# Altium PCB PCB_AEM_REV_2_5_2023-04-29.pcbdoc
Units mil, origin at the board's own origin, x right, y up, seen from the top; angles counter-clockwise.
Board outline 1740 x 2151.59 mil, 2 copper layers (Top Layer, Bottom Layer); 19 components, 24 nets, 80 pads, 33 vias.
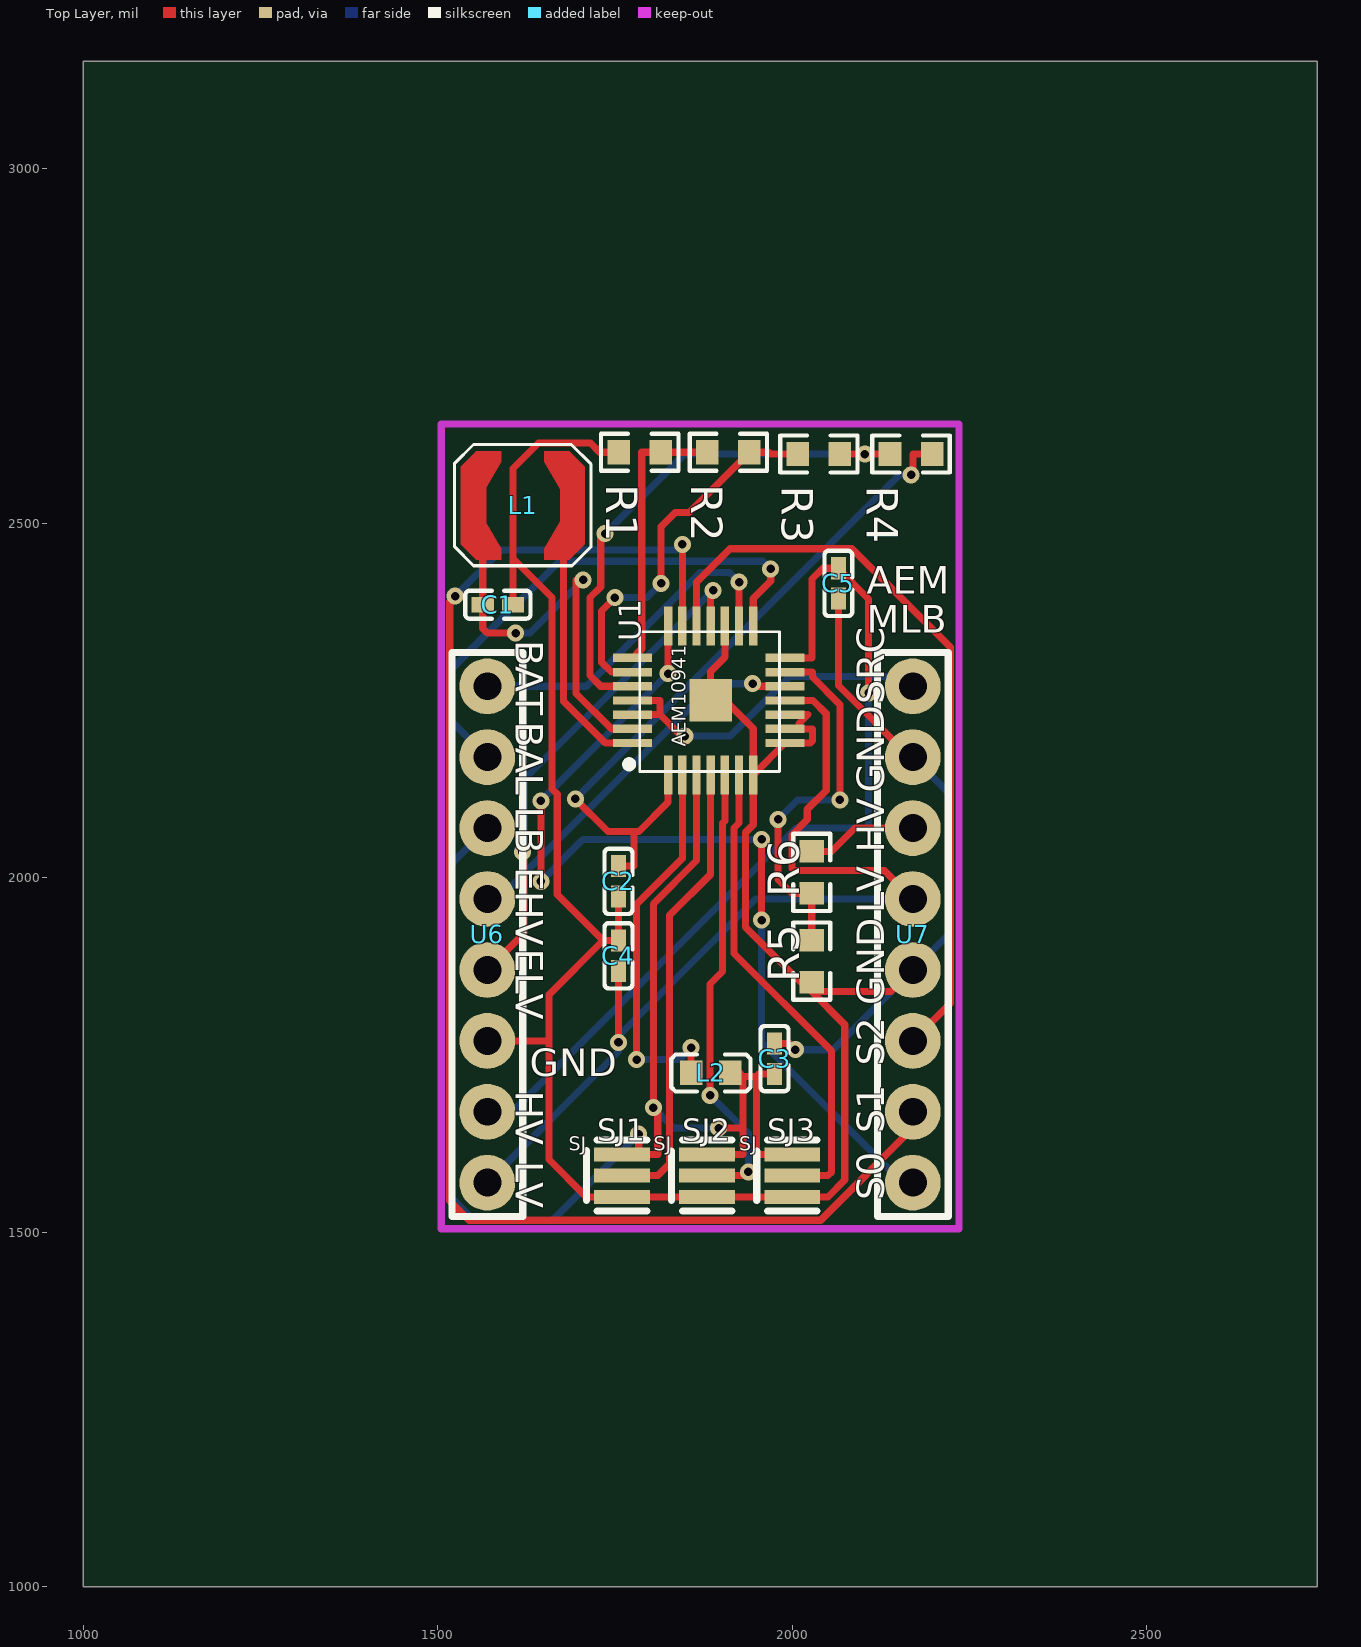
[diagram p0: Top Layer view]
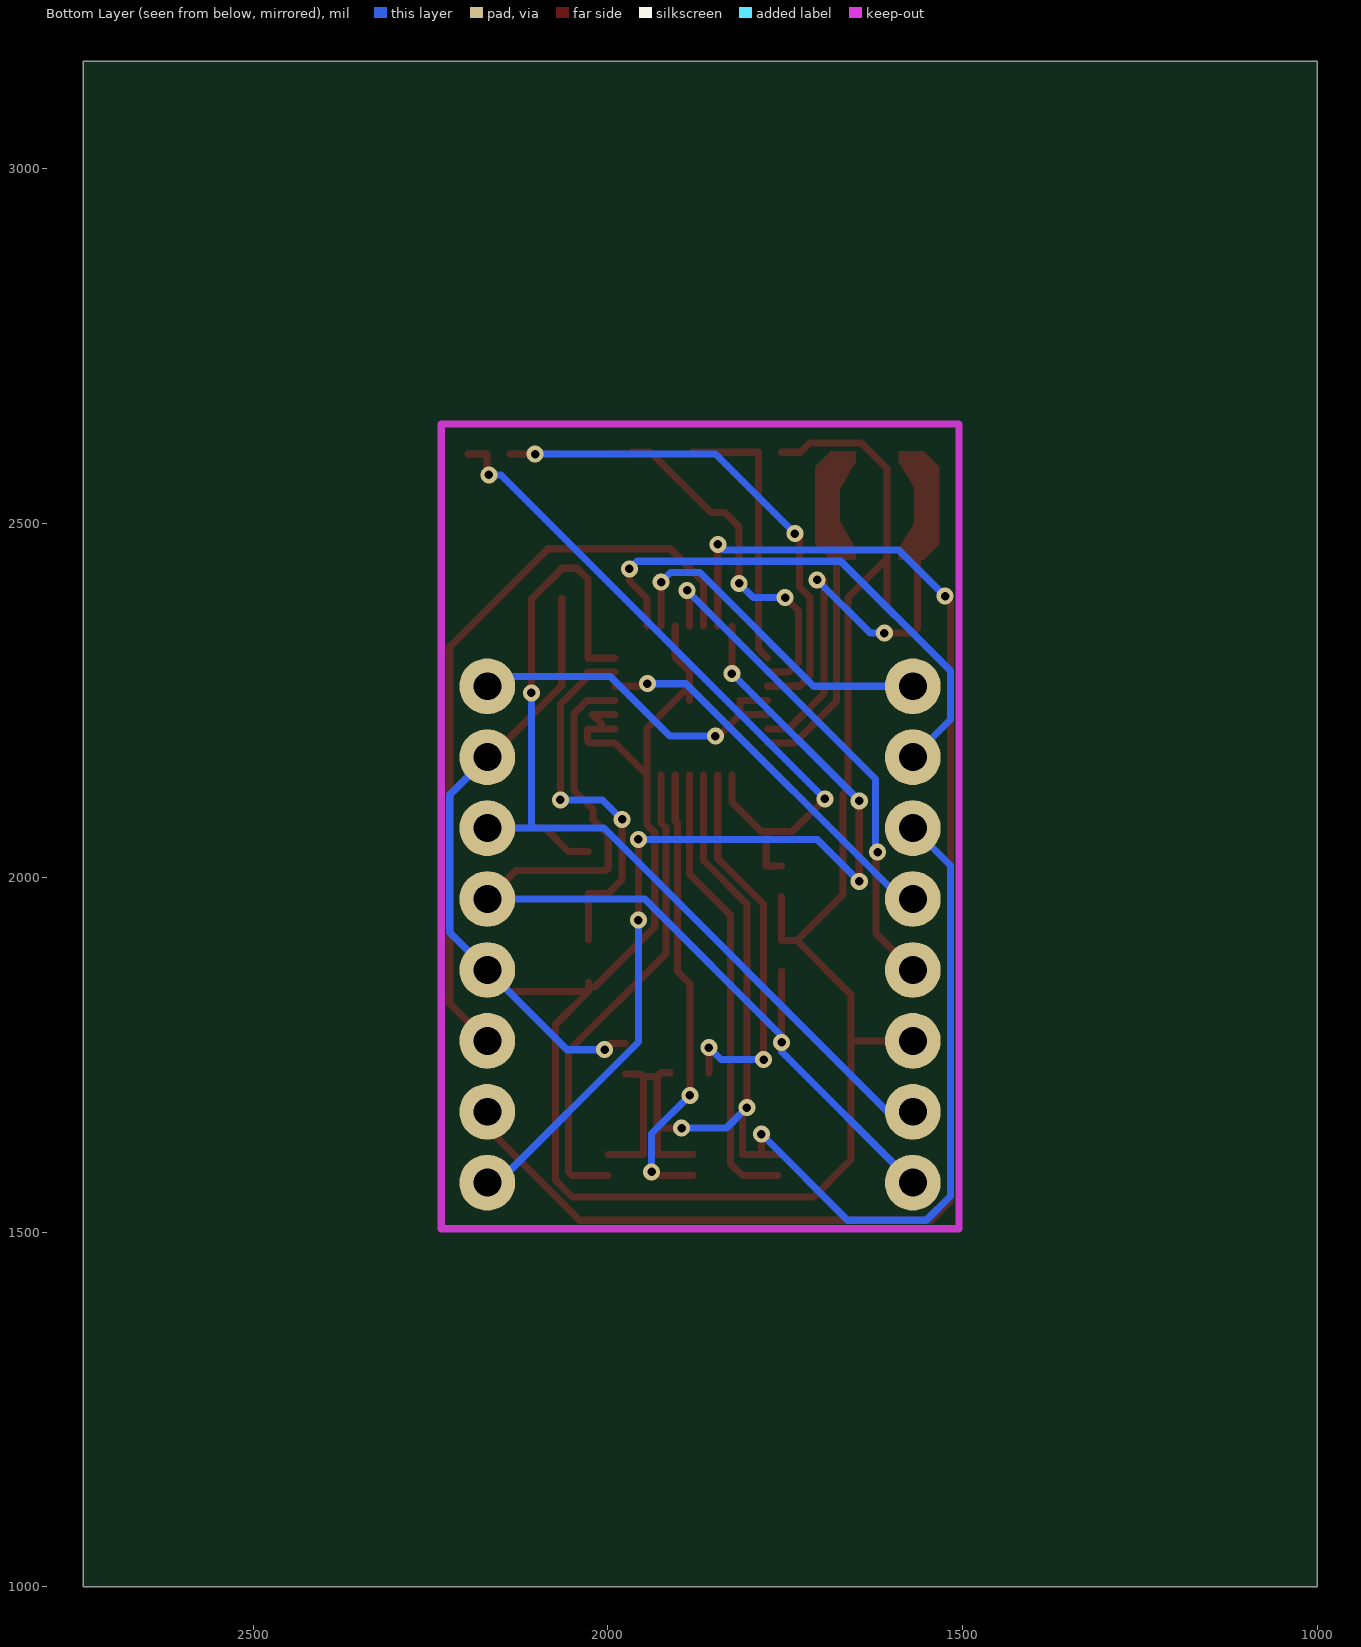
[diagram p1: Bottom Layer view, seen from below]

## Layer stack, top to bottom
Top Layer: signal copper (thickness not stored)
Dielectric: dielectric 12.6, FR-4, Dk 4.8
Bottom Layer: signal copper (thickness not stored)

## Board outline
2740,1000 1000,1000 1000,3151.59 2740,3151.59

## Components (designator, comment, footprint, x,y, rotation, side; value= is the part's Value field where it differs from the comment)
C1 "10uF" C0402 1585,2384.99 r180 top
C2 "22uF" C0402 1755,1994.99 r90 top
C3 "10uF" C0402 1975,1744.99 r270 top
C4 "10uF" C0402 1755,1889.99 r270 top
C5 "10uF" C0402 2065,2414.99 r90 top
L1 "LPS4012" "LPS4012 COILCRAFT" 1620,2524.99 r0 top
L2 "10uH" L0603 1885,1724.99 r180 top
R1 "11 Mohm" R0603 1785,2599.99 r0 top
R2 "0.249 Mohm" R0603 1910,2599.99 r0 top
R3 "8.66 Mohm" R0603 2037.5,2597.49 r0 top
R4 "30 Mohm" R0603 2167.5,2597.49 r0 top
R5 "4.53 Mohm" R0603 2027.5,1882.49 r90 top
R6 "5.49 Mohm" R0603 2027.5,2007.49 r90 top
SJ1 "Solder_Jumper" SOLDER_JUMPER 1760,1579.99 r0 top
SJ2 "Solder_Jumper" SOLDER_JUMPER 1880,1579.98 r0 top
SJ3 "Solder_Jumper" SOLDER_JUMPER 2000,1579.98 r0 top
U1 "AEM10941_QFN28" AEM_QFN28 1785,2149.99 r90 top
U6 "8_pin_2.54_header" 8_PIN_HEADER 1570,1570 r0 top
U7 "8_pin_2.54_header" 8_PIN_HEADER 2170,1570 r0 top

## Footprints (in the part's own frame and the unit in brackets; to place one, negate y for a bottom-side part, rotate by r counter-clockwise, add the part's x,y. Pads: shape width x height; smd on the part's side, far side on the other; paste and mask are expansions set on the pad)
8_PIN_HEADER [mm]
  round 2 hole 1: 1(0,0) 2(0,2.54) 3(0,5.08) 4(0,7.62) 5(0,10.16) 6(0,12.7) 7(0,15.24) 8(0,17.78)
  silkscreen extent -1.27,-1.21 1.27,18.99
AEM_QFN28 [mm]
  rect 1.4x0.3 smd: 1(-0.127,-1.016) 2(-0.127,-1.524) 3(-0.127,-2.032) 4(-0.127,-2.54) 5(-0.127,-3.048) 6(-0.127,-3.556) 7(-0.127,-4.064) 15(5.207,-4.064) 16(5.207,-3.556) 17(5.207,-3.048) 18(5.207,-2.54) 19(5.207,-2.032) 20(5.207,-1.524) 21(5.207,-1.016)
  rect 0.3x1.4 smd: 8(1.016,-5.207) 9(1.524,-5.207) 10(2.032,-5.207) 11(2.54,-5.207) 12(3.048,-5.207) 13(3.556,-5.207) 14(4.064,-5.207) 22(4.064,0.254) 23(3.556,0.254) 24(3.048,0.254) 25(2.54,0.254) 26(2.032,0.254) 27(1.524,0.254) 28(1.016,0.254)
  rect 1.524x1.524 smd: 29(2.54,-2.54)
  silkscreen extent 0,-5 5,0.51
C0402 [mm]
  rect 0.79x0.54 smd: 1(-0.545,0) 2(0.545,0)
  silkscreen extent -1.17,-0.5 1.17,0.5
L0603 [mm]
  rect 0.8x0.864 smd: 1(-0.7,0) 2(0.7,0)
  silkscreen extent -1.42,-0.65 1.41,0.67
"LPS4012 COILCRAFT" [mil]
  round 0 smd: 1(-57.5,50) 2(57.5,-50)
  Top Layer region: -87.5,54.9 -65.5,76.6 -30.4,76.6 -30.4,61.3 -53.2,22.6 -53.2,-22.6 -30.4,-61.3 -30.4,-76.6 -65.5,-76.6 -87.5,-54.9
  Top Layer region: 87.5,-54.9 65.5,-76.6 30.4,-76.6 30.4,-61.3 53.2,-22.6 53.2,22.6 30.4,61.3 30.4,76.6 65.5,76.6 87.5,54.9
  silkscreen extent -96,-85 96,86
R0603 [mil]
  rect 31.75x34.02 smd: 1(-29.65,0) 2(29.65,0)
  silkscreen extent -55,-26 55,26
SOLDER_JUMPER [mm]
  rect 2x0.5 smd: 1(0,-0.762) 2(0,0) 3(0,0.762)
  silkscreen extent -1.27,-1.27 0.89,1.27

## Via types
v1: diameter 24, hole 12, Top Layer to Bottom Layer, tented both sides, 33 vias

## Nets (pads, with @x,y where several pads share a name; then routed paths per layer and width w, separated by ;. In a path a pad name is that pad's centre, name@x,y a point inside that pad or via, vN(x,y) a via of type N, cw(c..) or ccw(c..) an arc to the next point about the centre after c; other vN are vias at no path point)
BAL: U1.15 U6.7 | length 755.6
  Top Layer w10: U1.15 1945,2393.56 1969.66,2418.22 v1(1969.66,2435.57)
  Bottom Layer w10: U6.7 1517.06,2222.94 1517.06,2291.78 1671.58,2446.3 1958.93,2446.3 v1(1969.66,2435.57)
BATT: U1.16 U6.8 | length 488.8
  Top Layer w10: U1.16 v1(1925,2416.94)
  Bottom Layer w10: U6.8 1710,2270 1870.3,2430.2 1911.7,2430.2 v1(1925,2416.94)
CFG[0]: SJ3.2 U1.6 | length 677.6
  Top Layer w10: U1.6 1925,2077.42 1917.77,2070.19 1917.77,1893.32 2055.59,1755.5 2055.59,1585.19 2050.38,1579.98 SJ3.2
CFG[1]: SJ2.2 U1.5 | length 651.1
  Top Layer w10: SJ2.2 1933.01,1579.98 v1(1938.24,1585.21) ; v1(1884.25,1693.29) 1884.25,1850.27 1901.72,1867.74 1901.72,2076.84 1905,2080.12 U1.5
  Bottom Layer w10: v1(1884.25,1693.29) 1938.24,1639.3 v1(1938.24,1585.21)
CFG[2]: SJ1.2 U1.4 | length 646.3
  Top Layer w10: SJ1.2 1810.38,1579.99 1827.15,1596.76 1827.15,1947.08 1885.01,2004.94 U1.4
CHRDY: R2.2 R3.1 U1.23 | length 539.2
  Top Layer w10: v1(1750,2395) 1731.1,2376.1 1731.1,2303.9 1745,2290 U1.23 ; v1(1815,2414.99) 1815,2494.99 1835,2514.99 1854.66,2514.99 R2.2 1953.1,2599.99 1966.54,2599.99 1969.04,2597.49 R3.1
  Bottom Layer w10: v1(1750,2395) 1795.01,2395 v1(1815,2414.99)
ENHV: U1.12 U6.5 | length 547.3
  Top Layer w10: v1(1944.22,2273.6) 1947.83,2269.99 U1.12
  Bottom Layer w10: U6.5 1586.16,1970 1889.76,2273.6 v1(1944.22,2273.6)
ENLV: U1.18 U6.4 | length 720.6
  Top Layer w10: U6.4 1621.82,1921.82 1621.82,2033.84 v1(1619.61,2036.05) ; U1.18 1885,2401.93 v1(1888.32,2405.25)
  Bottom Layer w10: v1(1619.61,2036.05) 1622.46,2038.9 1622.46,2139.39 v1(1888.32,2405.25)
GND: C1.1 C2.1 C3.1 C4.1 C5.1 R1.1 R5.1 SJ1.1 SJ2.1 SJ3.1 U1.7 U1.8 U1.9 U1.10 U1.17 U1.29 U6.3 U7.4 U7.7 | length 4052.9
  Top Layer w10: U6.3 1657,1770 ; C1.1 1606.46,2577.24 1642.2,2612.98 1715.47,2612.98 1728.46,2599.99 R1.1 ; 1606.46,2450.15 1661.4,2395.21 1661.4,2343.5 1661.4,2125.1 1668.6,2118 1668.6,1976.2 1733.4,1911.5 ; C2.1 C4.1 1733.36,1911.45 1657,1835.09 1657,1770 ; U1.29 U1.29@1885,2270.5 ; U1.17 1905,2311 1885,2291 U1.29@1885,2270.5 ; C3.1 1996.64,1766.45 1996.64,1765.37 v1(2004.49,1757.52) ; U1.9 U1.9@2009.29,2209.99 ; U1.10 2021.96,2229.99 2009.29,2217.32 U1.9@2009.29,2209.99 ; R5.1 R5.1@2027.5,1846.11 ; C5.1 2065,2366.97 2065,2270.92 2165.92,2170 U7.7 ; U7.4 2139.39,1839.39 R5.1@2027.5,1839.39 ; 1657,1770 1657,1602.61 1709.62,1549.99 SJ1.1 1810.38,1549.99 SJ2.1 SJ3.1 2050.38,1549.98 2074.09,1573.69 2074.09,1792.8 R5.1@2027.5,1839.39 ; U1.29@1885,2270.5 1945,2210.5 U1.7 ; U1.7 1945,2106.42 1945,2074.72 1933.82,2063.54 1933.82,1930.75 2018.46,1846.11 R5.1@2027.5,1846.11 ; U1.7 U1.8 2025.66,2189.99 2028.57,2192.9 2028.57,2209.99 U1.9@2009.29,2209.99 ; R5.1@2027.5,1839.39 R5.1@2027.5,1846.11
  Bottom Layer w10: v1(2004.49,1757.52) 2057.52,1757.52 U7.4 2222.94,1922.94 2222.94,2117.06 U7.7
HV: C5.2 R6.2 U1.14 U6.2 U7.6 | length 1498.7
  Top Layer w10: U1.14 2022.3,2309.99 2027.36,2309.99 2027.97,2309.99 2027.97,2421.06 2043.36,2436.45 C5.2@2064.32,2436.45 ; R6.2@2027.5,2037.15 2055.52,2037.15 2088.37,2070 U7.6 ; C5.2 C5.2@2064.32,2436.45 ; v1(2107.76,2260.76) 2107.76,2393.01 C5.2@2064.32,2436.45
  Bottom Layer w10: U6.2 1605.48,1670 2005.48,2070 2107.76,2070 ; v1(2107.76,2260.76) 2107.76,2070 ; U7.6 2107.76,2070
LBUCK: C3.2 L2.1 SJ1.3 SJ2.3 SJ3.3 U1.3 U6.6 | length 2038.3
  Top Layer w10: SJ1.3 SJ1.3@1783.52,1609.99 ; v1(1783.52,1638.51) SJ1.3@1783.52,1609.99 ; U1.3 1864.99,2024.13 1804.07,1963.21 v1(1804.07,1675.96) 1810.38,1669.65 1810.38,1609.99 SJ1.3@1783.52,1609.99 ; SJ2.3 1881.57,1609.98 1905.19,1609.98 1930.38,1609.98 1930.38,1646.87 ; v1(1896.13,1646.87) 1930.38,1646.87 ; L2.1 1925.19,1724.98 1930.38,1719.79 ; C3.2 1953.36,1723.53 1949.62,1719.79 ; SJ3.3 1949.62,1609.98 1949.62,1719.79 ; 1930.38,1646.87 1930.38,1719.79 ; 1930.38,1719.79 1949.62,1719.79
  Bottom Layer w10: U6.6 1517.06,2017.06 1517.06,1551.15 1551.15,1517.06 1662.07,1517.06 v1(1783.52,1638.51) ; v1(1804.07,1675.96) 1833.16,1646.87 v1(1896.13,1646.87)
LV: C4.2 U1.11 U6.1 U7.5 | length 1371.6
  Top Layer w10: v1(1755,1767.82) C4.2 ; U1.11 2029.13,2249.99 2047.89,2231.23 2047.89,2123.24 2021.17,2096.52 2021.17,2082.02 1999.43,2060.28 1999.43,2013.12 2002.34,2010.21 2129.79,2010.21 U7.5
  Bottom Layer w10: U6.1 1755,1755 v1(1755,1767.82) 1755,1777.03 1947.97,1970 U7.5
OVCH: R1.2 R2.1 U1.22 | length 387.9
  Top Layer w10: U1.22 1787.8,2322.8 1787.8,2600 ; 1787.77,2599.99 R1.2 R2.1
OVDIS: R3.2 R4.1 U1.24 | length 758.8
  Top Layer w10: v1(1736.22,2485.4) 1730,2479.2 1730,2410 1715,2395 1715,2285 1730,2270 U1.24 ; R3.2 v1(2102.5,2597.49) R4.1
  Bottom Layer w10: v1(1736.22,2485.4) 1848.31,2597.49 v1(2102.5,2597.49)
S$23: 
SRC: U1.25 U1.26 U7.8 | length 506.7
  Top Layer w10: U1.26 1813.57,2229.99 ; U1.25 1813.57,2249.99 1813.57,2229.99 ; v1(1848.52,2199.64) 1843.92,2199.64 1813.57,2229.99
  Bottom Layer w10: v1(1848.52,2199.64) 1912.34,2199.64 1996.52,2283.82 2156.18,2283.82 U7.8
STAT0: U1.21 U7.1 | length 1351.2
  Top Layer w10: v1(1645.51,1994.84) v1(1645.51,2108.47) ; v1(1825,2287.96) U1.21 ; v1(1956.87,1940.3) v1(1956.87,2053.99)
  Bottom Layer w10: v1(1645.51,1994.84) 1704.66,2053.99 v1(1956.87,2053.99) ; v1(1645.51,2108.47) v1(1825,2287.96) ; v1(1956.87,1940.3) 1956.87,1768.44 2155.31,1570 U7.1
STAT1: U1.20 U7.2 | length 2063.1
  Top Layer w10: v1(1524.52,2397.02) 1517.06,2389.56 1517.06,1543.97 1543.97,1517.06 2040.17,1517.06 2170,1646.89 U7.2 ; U1.20 v1(1845,2470.17)
  Bottom Layer w10: v1(1524.52,2397.02) 1589.85,2462.35 1837.18,2462.35 v1(1845,2470.17)
STAT2: U1.19 U7.3 | length 1073.9
  Top Layer w10: U1.19 1865,2393.56 1865,2416.77 1912.13,2463.9 2084.42,2463.9 2222.9,2325.42 2222.9,1822.9 U7.3
U1_2: L2.2 U1.2 | length 547.6
  Top Layer w10: v1(1780.41,1743.55) 1780.41,1962.72 1845,2027.31 U1.2 ; L2.2 v1(1857.44,1760.35)
  Bottom Layer w10: v1(1780.41,1743.55) 1840.64,1743.55 v1(1857.44,1760.35)
U1_13: R5.2 R6.1 U1.13 | length 539.5
  Top Layer w10: v1(1979.93,2082.3) 1979.93,1997.38 1999.48,1977.83 R6.1 R5.2@2027.5,1912.15 ; U1.13 2028.57,2289.99 2028.57,2282.89 2067.05,2244.41 v1(2067.05,2109.8)
  Bottom Layer w10: v1(1979.93,2082.3) 2007.43,2109.8 v1(2067.05,2109.8)
U1_27: C1.2 L1.1 U1.27 | length 669.9
  Top Layer w10: L1.1 1563.54,2573.95 C1.2 1563.54,2351.45 1570,2344.99 v1(1610,2344.99) ; v1(1705,2419.99) 1695,2420 1695,2260 1745,2210 U1.27
  Bottom Layer w10: v1(1610,2344.99) 1630,2344.99 v1(1705,2419.99)
U1_28: L1.2 U1.28 | length 348
  Top Layer w10: L1.2 1677.5,2248.92 1736.43,2189.99 U1.28
VBOOST: C2.2 R4.2 U1.1 | length 996.3
  Top Layer w10: v1(1694.05,2111.19) 1740.05,2065.19 1776.64,2065.19 ; C2.2 1776.64,2016.45 1776.64,2065.19 ; U1.1 1825,2125.71 1825,2106.42 1783.77,2065.19 1776.64,2065.19 ; v1(2167.67,2568) 2170.27,2570.6 2170.27,2597.49 R4.2
  Bottom Layer w10: v1(1694.05,2111.19) 2150.86,2568 v1(2167.67,2568)

## Silkscreen, mask and mechanical layers (free items; w line width, h text height)
Top Overlay:
  text "AEM" at 2105,2400.3 h39.37
  text "MLB" at 2105,2345.3 h39.37
  text "BAT" at 1610.32,2334.99 h39.37 r270
  text "SRC" at 2129.68,2244.99 h39.37 r90
  text "BAL" at 1610.32,2219.99 h39.37 r270
  text "GND" at 2129.68,2119.99 h39.37 r90
  text "LB" at 1610.32,2099.99 h39.37 r270
  text "HV" at 2129.68,2034.99 h39.37 r90
  text "EHV" at 1610.32,2014.99 h39.37 r270
  text "LV" at 2129.68,1949.99 h39.37 r90
  text "ELV" at 1610.32,1899.99 h39.37 r270
  text "GND" at 2129.68,1819.99 h39.37 r90
  text "S2" at 2129.68,1734.99 h39.37 r90
  text "GND" at 1630,1720.31 h39.37
  text "HV" at 1610.32,1699.99 h39.37 r270
  text "S1" at 2129.68,1639.99 h39.37 r90
  text "LV" at 1610.32,1599.99 h39.37 r270
  text "S0" at 2129.68,1544.99 h39.37 r90
Document:
  lines w0.1: 1869.99,2075.78 1870.01,2075.8

## Text inside footprints (layer, text, board x,y; h text height)
SJ1: Top Overlay "SJ" at 1685,1615.15 h19.68
SJ2: Top Overlay "SJ" at 1805,1615.14 h19.68
SJ3: Top Overlay "SJ" at 1925,1615.14 h19.68
U1: Top Overlay "AEM10941" at 1849.84,2184.99 h19.68 r90